# Altium PCB BLE_PCB.PcbDoc
Units mm, origin at the board's own origin, x right, y up, seen from the top; angles counter-clockwise.
Board outline 19.13 x 24.3 mm, 2 copper layers (Top Layer, Bottom Layer); 17 components, 22 nets, 75 pads, 87 vias.
Unrouted connection lines stored in the file: 19.
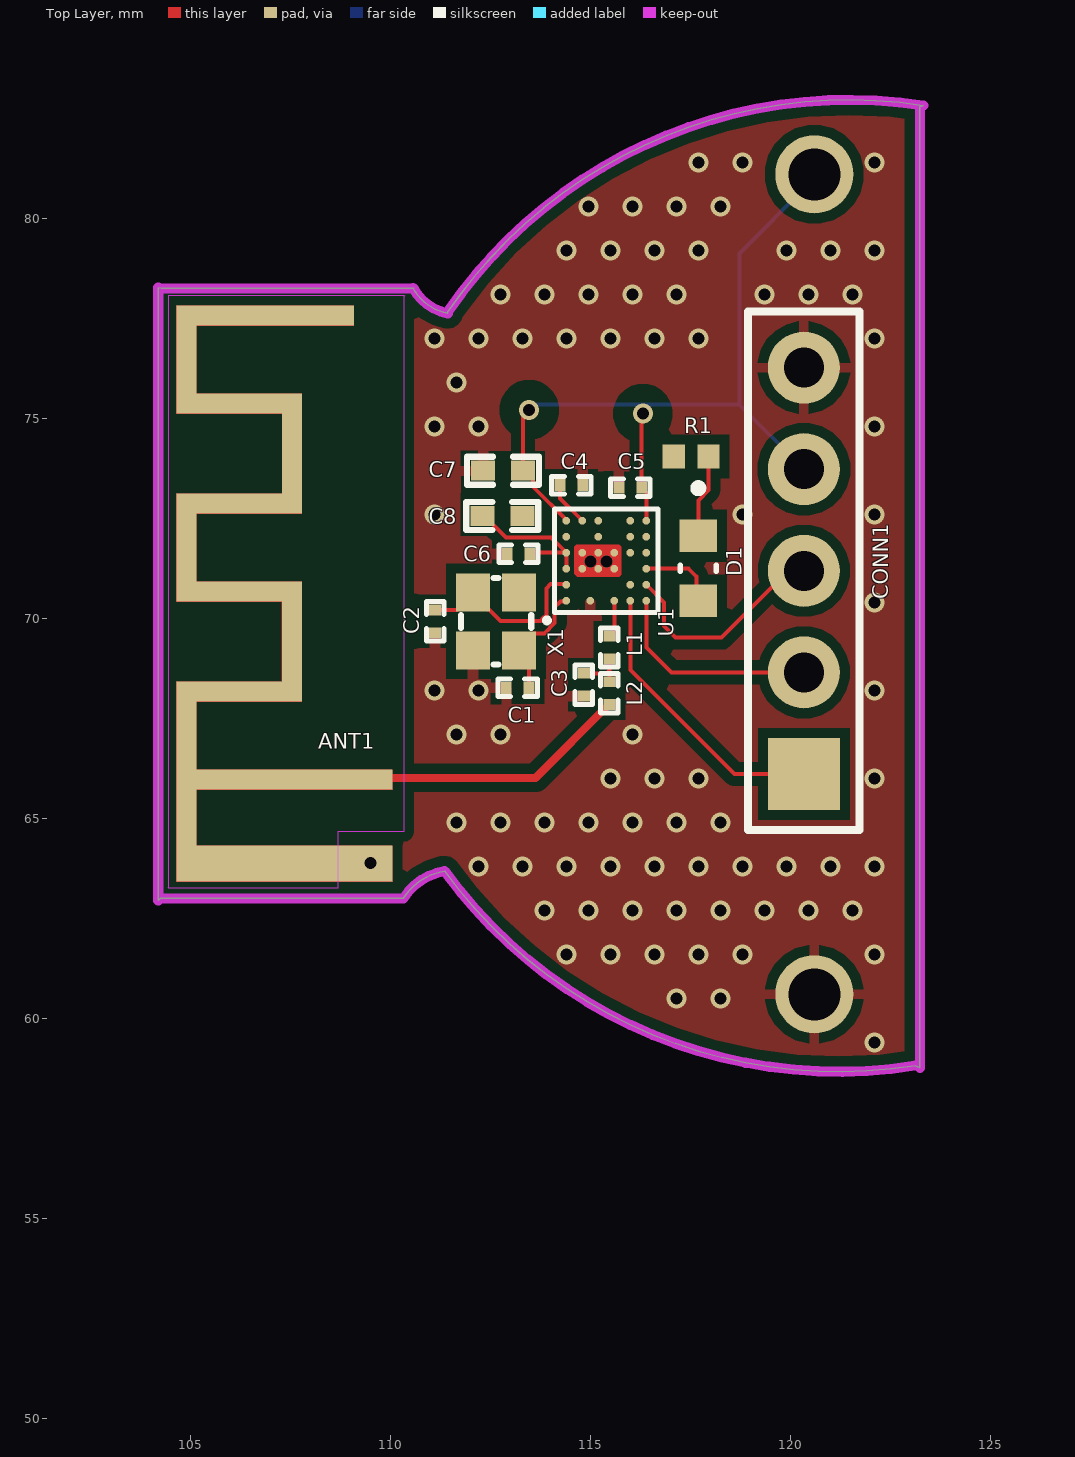
[diagram p0: Top Layer view]
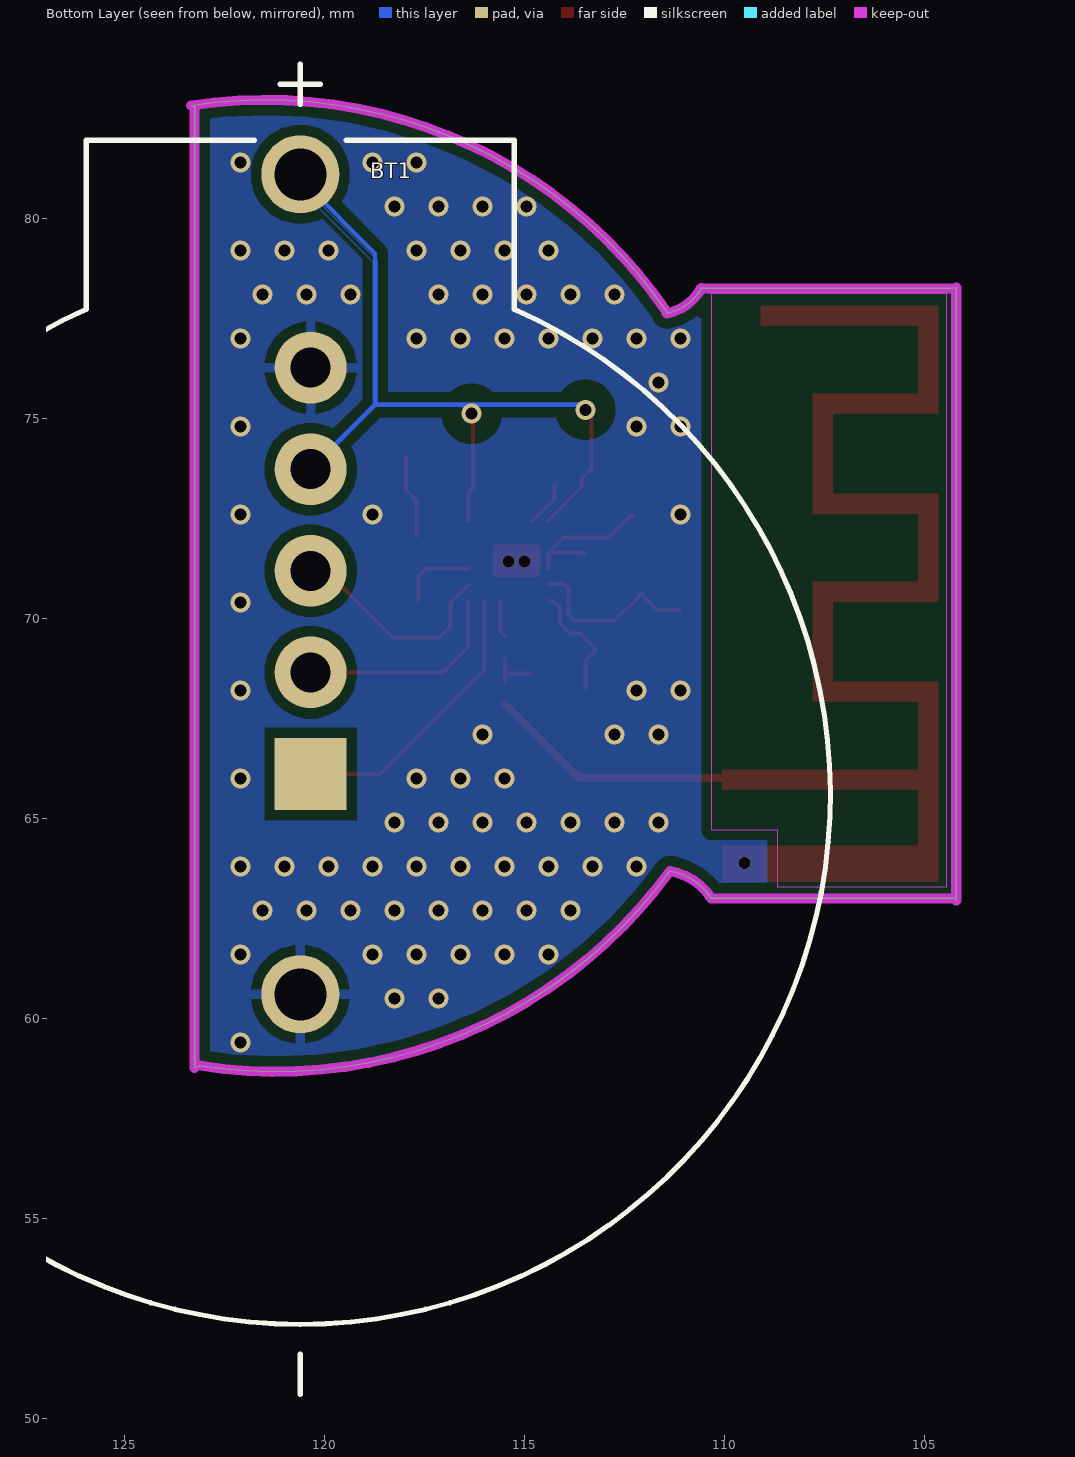
[diagram p1: Bottom Layer view, seen from below]
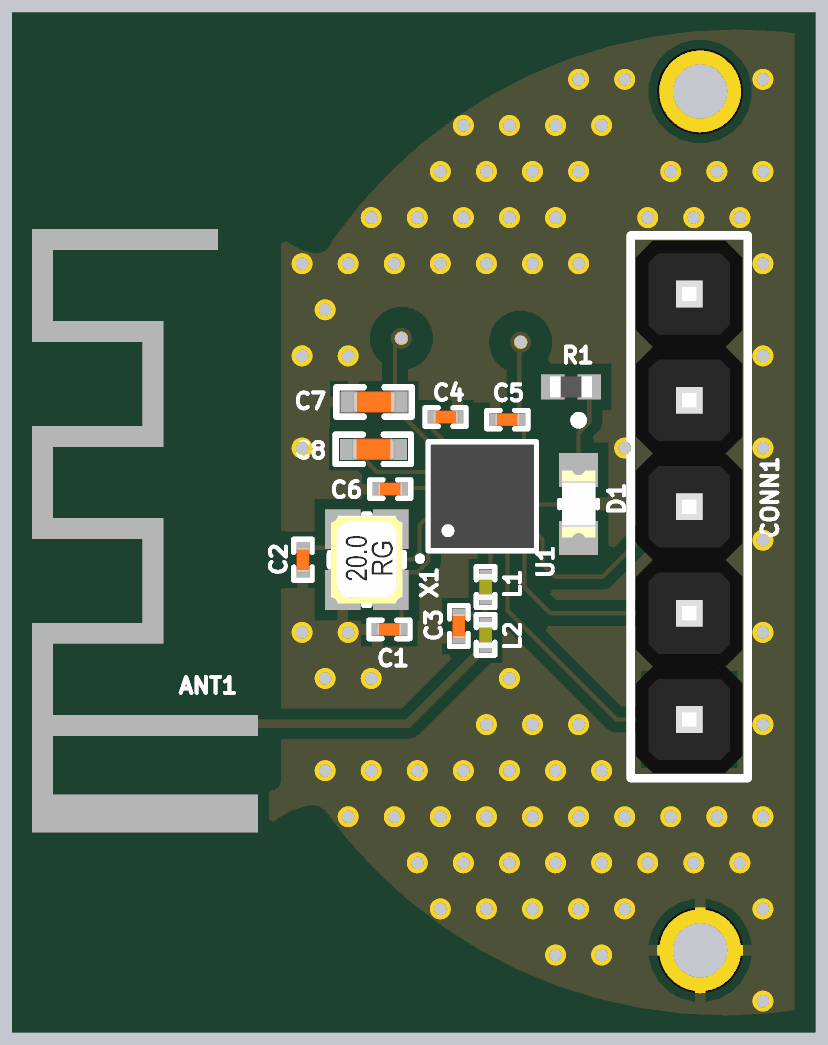
[diagram p2: 3D render of the assembled board from above, using the file's embedded part models]

## Layer stack, top to bottom
Top Solder: solder mask 0.0102, Solder Resist, Dk 3.5
Top Layer: signal copper 0.0356
Dielectric 1: dielectric 0.32, FR-4, Dk 4.8
Bottom Layer: signal copper 0.0356
Bottom Solder: solder mask 0.0102, Solder Resist, Dk 3.5

## Board outline
110.328,63.008 cw(c111.595,62.213) 111.36,63.69 ccw(c121.209,70.857) 123.123,58.828 123.24,58.77 123.24,82.8 123.325,82.83 ccw(c121.472,70.827) 111.426,77.653 111.437,77.634 cw(c111.69,78.89) 110.569,78.269 110.59,78.26 104.28,78.26 104.2,78.28 104.2,62.96 104.248,63.008

## Design rules (kind name [scope] priority, off if disabled: settings)
Clearance Clearance_1 [All] p1: gap=0.254 ignorepadtopadclearanceinfootprint=FALSE except(0: Arc-Hole Track-Hole SMDPad-Hole THPad-Hole Via-Hole Fill-Hole Poly-Hole Region-Hole Text-Hole; 0.01: Arc-Arc Arc-Track Arc-SMDPad Arc-THPad Track-Track Track-SMDPad Track-THPad Track-Region SMDPad-SMDPad SMDPad-THPad SMDPad-Region; 0.5: Via-Fill Via-Poly Via-Region)
Clearance [All] p2: gap=0.254 ignorepadtopadclearanceinfootprint=FALSE except(0: Arc-Hole Track-Hole SMDPad-Hole THPad-Hole Via-Hole Fill-Hole Poly-Hole Region-Hole Text-Hole; 0.01: Arc-Arc Arc-Track Arc-SMDPad Arc-THPad Track-Track Track-SMDPad Track-THPad Track-Region SMDPad-SMDPad SMDPad-THPad SMDPad-Region; 0.1: Track-Via Track-Poly Via-Fill Via-Poly Region-Region)
ComponentClearance [All] p1: gap=0 collisioncheckmode=3 verticalgap=0 showdistances=FALSE
HoleToHoleClearance [All] p1: gap=0.01 allowstackedmicrovias=TRUE
PlaneClearance [All] p1: clearance=0
PlaneConnect [All] p1 off: planeconnectstyle=Relief reliefexpansion=0.508 reliefentries=4 reliefconductorwidth=0.254 reliefairgap=0.9
PolygonConnect [IsStitchingVia] p1: connectstyle=Direct reliefconductorwidth=0.254 reliefentries=4 polygonreliefangle="90 Angle" airgapwidth=0.254
PolygonConnect PolygonConnect_1 [All] p2: connectstyle=Relief reliefconductorwidth=0.254 reliefentries=4 polygonreliefangle="90 Angle" airgapwidth=0.254
RoutingVias [All] p1: holewidth=0.3 width=0.5 viastyle="Through Hole" minholewidth=0.3 minwidth=0.3 maxholewidth=0.711 maxwidth=1.27
SolderMaskExpansion SolderMaskExpansion_1 [IsStitchingVia] p1: expansion=0 istentingtop=TRUE soldermaskfromhole=TRUE
Width [All] p1: maxlimit=0.2 minlimit=0.1 preferedwidth=0.1 minimp=50.000000 maximp=50.000000 favimp=50.000000
26 further rules are at their usual default settings.

## Components (designator, comment, footprint, x,y, rotation, side; value= is the part's Value field where it differs from the comment)
ANT1 "Antenna BT 2.4 GHz" Atenna_BT 110.192,67.27 r90 top
BT1 "Holder CR2477" BAT_122-3124-GR 120.6,65.612 r90 bottom
C1 "12pF" CAPC0603X03L_C 113.185,68.27 r180 top
C2 "12pF" CAPC0603X03L_C 111.12,69.935 r270 top
C3 "12pF" CAPC0603X03L_C 114.84,68.35 r90 top
C4 "12pF" CAPC0603X03L_C 114.525,73.34 r180 top
C5 "12pF" CAPC0603X03L_C 116,73.279 r0 top
C6 "12pF" CAPC0603X03L_C 113.205,71.62 r0 top
C7 "2.2µF" CAPC1005X04L 112.82,73.7 r0 top
C8 "2.2µF" CAPC1005X04L 112.8,72.57 r180 top
CONN1 "Connector" "1x5x2.54 Pin Header TH V" 120.34,71.199 r90 top
D1 "LED" LEDC1608X35N 117.7,71.263 r270 top
L1 "2.2nH" INDC0603X03L_C 115.479,69.281 r270 top
L2 "2.2nH" INDC0603X03L_C 115.479,68.138 r270 top
R1 "RMCF0402FT220R" RESC1005X35N 117.52,74.06 r180 top
U1 "" BGA28C40P6X6_247X246X50 115.4,71.45 r90 top value=nRF52805-CAAA
X1 "32MHz" BT-XTAL_2016 112.645,69.935 r90 top

## Footprints (in the part's own frame and the unit in brackets; to place one, negate y for a bottom-side part, rotate by r counter-clockwise, add the part's x,y. Pads: shape width x height; smd on the part's side, far side on the other; paste and mask are expansions set on the pad)
"1x5x2.54 Pin Header TH V" [mm] "1x5x2.54 Pin Header TH V"
  rect 1.8x1.8 all layers, no hole: 1(-5.08,0)
  round 1.8 hole 1: 2(-2.54,0) 3(0,0) 4(2.54,0) 5(5.08,0)
  silkscreen extent -6.48,-1.4 6.48,1.4, body extent -6.35,-1.27 6.35,1.27, height 8.55
Atenna_BT [mm] "2.4 GHz"
  rect 5x0.5 smd mask+0: 1(-1.34,5.292)
  rect 0.5x4.9 smd mask+0: 1(-1.291,2.592)
  rect 0.5x2.64 smd mask+0: 1(0.91,3.722) 1(3.41,3.722) 1(5.61,3.722) 1(8.11,3.722)
  rect 2x0.5 smd mask+0: 1(2.16,2.652) 1(6.86,2.652)
  rect 2.7x0.5 smd mask+0: 1(4.51,5.292) 1(9.21,5.292)
  rect 0.5x3.94 smd mask+0: 1(10.31,3.071)
  rect 0.9x4.9 smd paste+0 mask+0: 2(-3.39,2.592)
  Top Layer region: -3.841,0.142 -3.84,0.143 -2.941,0.143 -2.941,5.043 -2.941,5.043 -2.938,5.041 -1.541,5.041 -1.541,0.143 -1.041,0.143 -1.041,5.044 -1.041,5.042 0.659,5.042 0.659,5.042 0.66,5.042 0.66,2.402 3.659,2.402 3.659,5.043 3.66,5.042 5.36,5.042 5.36,2.403 5.359,2.402 5.359,2.402 8.36,2.402 8.36,5.043 8.36,5.042 10.06,5.042 10.06,1.101 10.06,1.101 10.06,1.101 10.559,1.101 10.559,5.541 10.559,5.542 7.858,5.542 7.858,2.748 7.859,2.749 7.859,2.9 7.86,2.899 7.86,2.899 5.857,2.899 5.857,5.54 5.853,5.543 5.853,5.543 3.161,5.543 3.161,2.706 3.16,2.705 3.16,2.903 1.16,2.903 1.159,2.904 1.159,5.543 -3.841,5.543 -3.84,5.542 -3.84,0.142
BAT_122-3124-GR [mm]
  round 1.95 hole 1.3 mask+0.05: N(-5,0) P(15.5,0)
  silkscreen extent -15,-13.25 18.25,13.25
BGA28C40P6X6_247X246X50 [mm]
  round 0.194 smd mask+0.05: A1(-1,1) A2(-0.6,1) A3(-0.2,1) A4(0.2,1) A5(0.6,1) A6(1,1) B3(-0.2,0.6) B4(0.2,0.6) B6(1,0.6) C1(-1,0.4) D3(-0.2,0.2) D4(0.2,0.2) D5(0.6,0.2) D6(1,0.2) E1(-1,-0.2) E3(-0.2,-0.2) E4(0.2,-0.2) F1(-1,-0.6) F2(-0.6,-0.6) F4(0.2,-0.6) F5(0.6,-0.6) F6(1,-0.6) G1(-1,-1) G2(-0.6,-1) G3(-0.2,-1) G4(0.2,-1) G5(0.6,-1) G6(1,-1)
  silkscreen extent -1.55,-1.29 1.3,1.55, body extent -1.23,-1.23 1.23,1.23, height 0.5
BT-XTAL_2016 [mm]
  rect 0.95x0.85 smd: 1(-0.725,-0.575) 2(0.725,-0.575) 3(0.725,0.575) 4(-0.725,0.575)
  silkscreen extent -1.08,-0.88 1.08,0.88, body extent -1.05,-0.85 1.05,0.85, height 0.56
CAPC0603X03L_C [mm]
  rect 0.27x0.3 smd: 1(-0.285,0) 2(0.285,0)
  silkscreen extent -0.49,-0.22 0.49,0.22, body extent -0.3,-0.15 0.31,0.15, height 0.3
CAPC1005X04L [mm]
  rect 0.6x0.5 smd: 1(-0.5,0) 2(0.5,0)
  silkscreen extent -0.9,-0.35 0.9,0.35, body extent -0.51,-0.25 0.51,0.25, height 0.5
INDC0603X03L_C [mm]
  rect 0.27x0.3 smd: 1(-0.285,0) 2(0.285,0)
  silkscreen extent -0.49,-0.22 0.49,0.22, body extent -0.31,-0.16 0.31,0.16, height 0.26
LEDC1608X35N [mm]
  rect 0.81x0.93 smd: A(0.81,0) C(-0.81,0)
  silkscreen extent -2.1,-0.45 0.09,0.45, body extent -0.8,-0.4 0.8,0.4, height 0.8
RESC1005X35N [mm] "0402"
  rect 0.56x0.6 smd: 1(-0.435,0) 2(0.435,0)
  body extent -0.5,-0.25 0.5,0.25, height 0.36

## Part data
ANT1: library part Antenna_BT, "Antenna BT 2.4 GHz / 50 Ohms impedance"
BT1: library part 122-3124-GR, "Coin Cell Battery Holders CR2477 COIN CELL HL", Package=None, Availability="In Stock", Check_prices=https://www.snapeda.com/parts/122-3124-GR/Eagle+Plastic+Devices/view-part/?ref=eda, MF="Eagle Plastic Devices", MP=122-3124-GR, Price=None, SnapEDA_Link=https://www.snapeda.com/parts/122-3124-GR/Eagle+Plastic+Devices/view-part/?ref=snap
C1 C2 C3 C4 C5 C6: library part CAP_0201, "Capacitor, NP0, ±2%", Part Number=C0201-12p, Footprint Doc=0201, LatestRevisionDate=2017-11-09, Pin Count=2, Published=2014-11-13, Publisher="Nordic Semiconductor"
C7 C8: library part CAP_0402, "Capacitor, X5R, ±20%", Part Number=C0402-2µ2, Footprint Doc=0402, LatestRevisionDate=2006-06-02, Pin Count=2, Published=2009-05-08, Publisher="Nordic Semiconductor"
CONN1: library part "Header 1x5"
D1: "Red 631nm LED Indication - Discrete 2V 0603 (1608 Metric)", Package="0603 Lite-On", Supplier Part Number 1=LTST-C190KRKT, Availability="In Stock", Check_prices=https://www.snapeda.com/parts/LTST-C190KRKT/Lite-On+Inc./view-part/?ref=eda, MF="Lite-On Inc.", MP=LTST-C190KRKT, Price=None, Purchase-URL=https://pricing.snapeda.com/search/part/LTST-C190KRKT/?ref=eda, SnapEDA_Link=https://www.snapeda.com/parts/LTST-C190KRKT/Lite-On+Inc./view-part/?ref=snap, Supplier 1="Arrow Electronics"
L1 L2: library part IND_0201, "High frequency chip inductor ±5%", Part Number=L0201-2n2, Footprint Doc=0201, LatestRevisionDate=2013-04-10, Pin Count=2, Published=2013-04-10, Publisher="Nordic Semiconductor"
R1: "Res Thick Film 0402 220 Ohm 1% 0.063W(1/16W) ±100ppm/C Pad SMD T/R", Case Code (Imperial)=0402, Case Code (Metric)=1005, Case/Package=Molded, Manufacturer="Walsin Technologies", Manufacturer Part Number=WR04X2200FTL, Max Operating Temperature=155°C, Min Operating Temperature=-55°C, Package=None, Power Rating=62.5mW, Resistance=220R, Resistance Tolerance=1%, Resistor Type="Thick Film", Supplier Part Number 1=1292-WR04X2200FTLCT-ND, Temperature Coefficient=100ppm/°C, Voltage Rating=50V, Availability=Unavailable, Category="Chip SMD Resistors", ComponentLink1Description=https://datasheet.ciiva.com/26865/getdatasheetpartid-414190-26865262.pdf?src-supplier=Verical, ComponentLink1URL=https://datasheet.ciiva.com/26865/getdatasheetpartid-414190-26865262.pdf?src-supplier=Verical, Construction=Rectangular, Contact Material=Tin, Depth=0.5mm, Lead Free="Lead Free", Length=1mm, Military Standard=Not, MP=RMCF0402FT220R, Packaging="Tape and Reel", Price=None, Pricing 1="1=0.1, 10=0.01, 50=0.0034, 100=0.0024, 500=0.0015, 1000=0.0011, 5000=0.00079 (USD)", Reach SVHC Compliant=Unknown, RoHS=Yes, RoHS Compliant=Yes, Stock 1=49048, Supplier 1=Digi-Key, Tolerance=1%, Voltage Rating (DC)=50V
U1: library part nRF52805_CAAA, "Multi-protocol Bluetooth Low Energy, IEEE 802.15.4, ANT and 2.4GHz proprietary system-on-chip", Manufacturer="Nordic Semiconductor", Manufacturer Part Number=nRF52805-CAAA, Footprint Doc=WLCSP-28, LatestRevisionDate=2018-11-28, Part Number=nRF52805-CAAA, Pin Count=28, Published=2018-11-28, Publisher="Nordic Semiconductor"
X1: library part XTAL_SMD2016, "XTAL SMD 2016, 32MHz, Cl=8pF, Total Tol: ±40ppm", Part Number=XTAL_SMD2016_32MHz_8pF_General, Footprint Doc=XTAL_2016, LatestRevisionDate=2016-08-19, Pin Count=4, Published=2016-08-19, Publisher="Nordic Semiconductor"

## Via types
v1: diameter 0.5, hole 0.3, Top Layer to Bottom Layer, 82 vias
v2: diameter 0.3, hole 0.3, Top Layer to Bottom Layer, tented both sides, 3 vias
v3: diameter 0.5, hole 0.3, Top Layer to Bottom Layer, tented both sides, 2 vias

## Nets (pads, with @x,y where several pads share a name; then routed paths per layer and width w, separated by ;. In a path a pad name is that pad's centre, name@x,y a point inside that pad or via, vN(x,y) a via of type N, cw(c..) or ccw(c..) an arc to the next point about the centre after c; other vN are vias at no path point)
DEC1: C4.2 U1.B6 | length 1.2
  Top Layer w0.1: C4.2@114.22,73.36 C4.2 114.24,73.01 U1.B6
DEC4: C6.2 C8.2 U1.A3 U1.A4 | length 3.8
  Top Layer w0.1: C8.2 112.35,72.57 112.89,72.03 114.02,72.03 U1.A4 ; C6.2 113.52,71.65 U1.A4 ; U1.A3 U1.A4
GND: ANT1.2 BT1.N C1.2 C2.2 C3.1 C4.1 C5.1 C6.1 C7.1 C8.1 CONN1.5 R1.2 U1.B3 U1.B4 U1.C1 U1.D3 U1.D4 U1.E3 U1.E4 X1.2 X1.4
  other v1: 122.1,59.4 117.15,60.5 118.25,60.5 114.4,61.6 115.5,61.6 116.6,61.6 117.7,61.6 118.8,61.6 122.1,61.6 113.85,62.7 114.95,62.7 116.05,62.7 117.15,62.7 118.25,62.7 119.35,62.7 120.45,62.7 121.55,62.7 112.2,63.8 113.3,63.8 114.4,63.8 115.5,63.8 116.6,63.8 117.7,63.8 118.8,63.8 119.9,63.8 121,63.8 122.1,63.8 111.65,64.9 112.75,64.9 113.85,64.9 114.95,64.9 116.05,64.9 117.15,64.9 118.25,64.9 115.5,66 116.6,66 117.7,66 122.1,66 111.65,67.1 112.75,67.1 116.05,67.1 111.1,68.2 112.2,68.2 122.1,68.2 122.1,70.4 111.1,72.6 118.8,72.6 122.1,72.6 111.1,74.8 112.2,74.8 122.1,74.8 111.65,75.9 111.1,77 112.2,77 113.3,77 114.4,77 115.5,77 116.6,77 117.7,77 122.1,77 112.75,78.1 113.85,78.1 114.95,78.1 116.05,78.1 117.15,78.1 119.35,78.1 120.45,78.1 121.55,78.1 114.4,79.2 115.5,79.2 116.6,79.2 117.7,79.2 119.9,79.2 121,79.2 122.1,79.2 114.95,80.3 116.05,80.3 117.15,80.3 118.25,80.3 117.7,81.4 118.8,81.4 122.1,81.4
  other v2: 109.5,63.894 115,71.435 115.4,71.437
NetC3_2: C3.2 L1.2 L2.1 | length 1.2
  Top Layer w0.1: C3.2 115.405,68.635 115.479,68.71 ; L2.1 115.479,68.71 ; L1.2 115.479,68.71
NetD1_C: D1.C R1.1 | length 2.1
  Top Layer w0.1: D1.C 117.7,72.959 117.955,73.214 R1.1
NetL1_1: L1.1 U1.E1 | length 0.9
  Top Layer w0.1: L1.1 115.494,69.566 115.6,69.672 U1.E1
P0.00/XL1: U1.D6
P0.01/XL2: U1.D5
P0.04/AIN2: U1.F5
P0.05/AIN3: U1.F6
P0.12: U1.G5
P0.14: U1.F4
P0.16: U1.G4
P0.18: D1.A U1.G3 | length 2
  Top Layer w0.1: U1.G3 117.459,71.25 117.65,71.059 117.65,70.504 D1.A
P0.20: U1.F2
P0.21/RESET: CONN1.3 U1.G2 | length 5.5
  Top Layer w0.1: U1.G2 116.84,70.41 116.84,69.82 117.13,69.53 118.28,69.53 119.949,71.199 CONN1.3
RF: ANT1.1 L2.2 | length 6.6
  Top Layer w0.1: L2.2@115.464,67.853 L2.2
  Top Layer w0.2: ANT1.1@109.6,66.02 113.631,66.02 L2.2@115.464,67.853
SWCLK: CONN1.2 U1.G1 | length 5.4
  Top Layer w0.1: U1.G1 116.41,70.44 116.41,69.28 117.031,68.659 CONN1.2
SWDIO: CONN1.1 U1.F1 | length 7.1
  Top Layer w0.1: U1.F1 116,68.72 118.601,66.119 CONN1.1
VDD_nRF: BT1.P C5.2 C7.2 CONN1.4 U1.A6 U1.G6 | length 20.3
  Top Layer w0.1: v3(113.47,75.22) 113.32,75.07 C7.2 113.37,73.7 113.57,73.5 113.57,73.3 114.4,72.47 U1.A6 ; v3@116.35,75.16 v3(116.317,75.127) 116.285,75.095 C5.2 116.285,73.264 116.4,73.149 U1.G6
  Bottom Layer w0.1: v3@113.45,75.21 113.59,75.35 116.53,75.35 ; v3@116.36,75.18 116.53,75.35 ; CONN1.4 118.729,75.35 ; BT1.P@120.6,80.877 120.474,80.877 118.729,79.132 118.729,75.35 ; 116.53,75.35 118.729,75.35
XC1: C1.1 U1.A1 X1.1 | length 3
  Top Layer w0.1: C1.1 113.47,68.96 X1.1 113.22,69.26 113.595,69.635 113.855,69.635 114.11,69.89 114.11,70.29 114.252,70.432 114.382,70.432 U1.A1
XC2: C2.1 U1.A2 X1.3 | length 4.5
  Top Layer w0.1: C2.1 111.68,70.22 112.07,70.61 112.07,70.63 112.2,70.5 112.2,70.48 112.445,70.235 112.465,70.235 112.76,69.94 113.751,69.94 113.81,69.999 113.81,70.001 113.9,70.091 113.9,70.76 114.01,70.87 114.155,70.87 114.157,70.868 114.382,70.868 U1.A2
pads on no net: U1.A5

## Polygon pours and split planes (outlines as drawn)
no net on Bottom Layer "NONET_L02_P000" (none, pour order 0): 113.414,75.246 ccw(c113.45,75.21) 113.486,75.174 113.611,75.3 116.408,75.3 116.324,75.216 ccw(c116.36,75.18) 116.396,75.144 116.551,75.3 118.708,75.3 120.304,73.703 ccw(c120.34,73.739) 120.39,73.739 ccw(c120.34,73.739) 120.375,73.775 118.779,75.371 118.779,78.918 120.626,80.764 ccw(c120.59,80.8) 120.64,80.8 ccw(c120.59,80.8) 120.554,80.836 118.693,78.974 ccw(c118.728,78.939) 118.678,78.939 118.678,75.4 113.59,75.4 ccw(c113.59,75.35) 113.554,75.385
GND on Bottom Layer "BOTTOM GND" (solid, remove dead copper, pour order 3): 110.337,63.015 cw(c111.604,62.22) 111.369,63.698 ccw(c121.218,70.865) 123.131,58.835 123.249,58.778 123.249,82.808 123.334,82.838 ccw(c121.481,70.835) 111.435,77.66 111.445,77.641 cw(c111.699,78.898) 110.578,78.276 110.599,78.268 104.289,78.268 104.209,78.288 104.209,62.968 104.256,63.015
GND on Top Layer "TOP GND" (solid, remove dead copper, pour order 1): 110.328,63.008 cw(c111.595,62.213) 111.36,63.69 ccw(c121.209,70.857) 123.123,58.828 123.24,58.77 123.24,82.8 123.325,82.83 ccw(c121.472,70.827) 111.426,77.653 111.437,77.634 cw(c111.69,78.89) 110.569,78.269 110.59,78.26 104.28,78.26 104.2,78.28 104.2,62.96 104.248,63.008

## Keep-outs
Top Layer:
  region: 108.69,63.26 104.46,63.26 104.45,63.27 104.46,63.28 104.46,78.09 110.34,78.09 110.36,78.07 110.34,78.05 110.34,64.68 108.7,64.68 108.69,64.67
Bottom Layer:
  region: 108.67,63.3 104.44,63.3 104.43,63.31 104.44,63.32 104.44,78.13 110.32,78.13 110.34,78.11 110.32,78.09 110.32,64.72 108.68,64.72 108.67,64.71
Keep-Out Layer:
  lines w0.254: 104.2,62.96 104.2,78.28 ; 104.248,63.008 110.328,63.008 cw(c111.595,62.213) 111.36,63.69 ccw(c121.209,70.857) 123.123,58.828 ; 104.28,78.26 105.855,78.26 109.085,78.26 110.59,78.26 ; 110.569,78.269 ccw(c111.69,78.89) 111.437,77.634 ; 111.426,77.653 cw(c121.472,70.827) 123.325,82.83 ; 123.24,58.77 123.24,64.717 123.24,76.612 123.24,82.8

## Other copper
Top Layer:
  region net GND: 114.65,71.85 115.725,71.85 115.775,71.8 115.775,71.1 115.725,71.05 114.675,71.05 114.6,71.125 114.6,71.8